# EAGLE board VoltSensor (EAGLE 8.2.2)
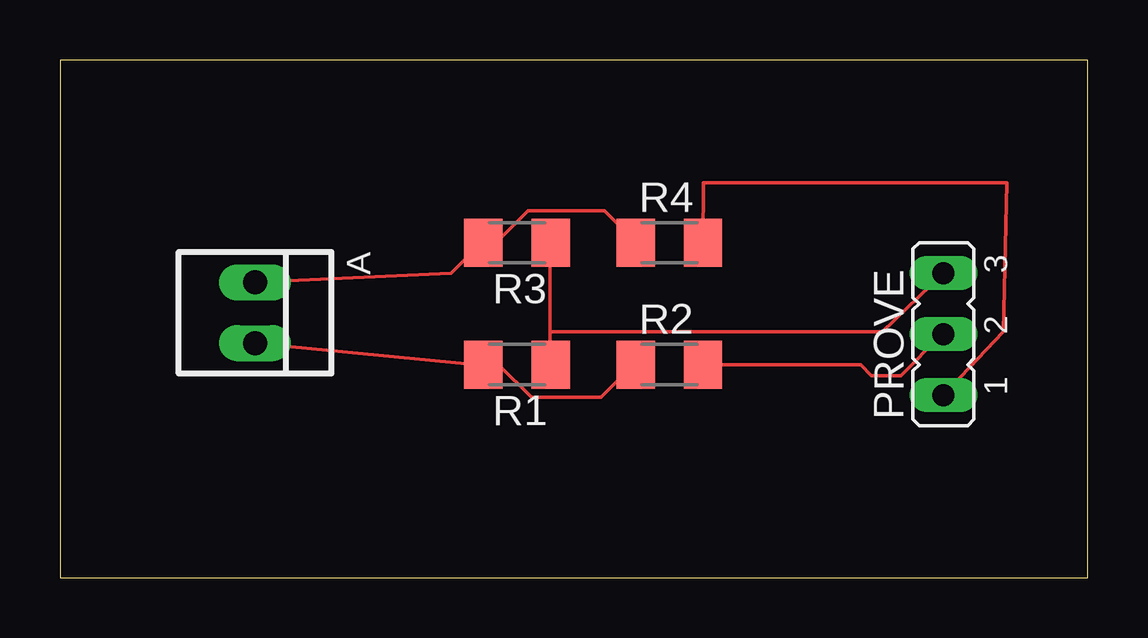
[diagram p0: board, top side]

Size 42.85 x 21.58 mm. Coordinates in mm from the lower left corner, seen from the top.
Outline: 0,0 42.85,0 42.85,21.58 0,21.58 0,0
Copper layers (1*16): Top 0.035mm / dielectric 1.5mm / Bottom 0.035mm
Design rules "default": minimum track width 6mil, minimum drill 0.35mm, track to track 6mil, track to pad 6mil, pad to pad 6mil, via to via 6mil, smd to smd 6mil, copper to edge 40mil, drill to drill 6mil, minimum pad ring 10mil, minimum via ring 8mil, stop-mask expansion 4mil, vias tented up to drill 0mil, thermal gap 10mil

## Footprints (pad centres in the part's own frame; a part is rotated, then mirrored left to right if it is on the bottom)
22-23-2021 = drill 1 long: 1 -1.27,0; 2 1.27,0
JP2 = drill 0.914 long: 1 -2.54,0; 2 0,0; 3 2.54,0
M1206 = smd 1.6 x 2: 1 -1.4,0; 2 1.4,0

## Placement (x,y rotation side)
A  to ADS1015 A0,A1  [22-23-2021]  8.13,11.05 270 top
PROVE  [JP2]  36.83,10.16 90 top
R1  100kΩ  [M1206]  19.05,8.89 180 top
R2  510kΩ  [M1206]  25.4,8.89 0 top
R3  100kΩ  [M1206]  19.05,13.97 180 top
R4  510kΩ  [M1206]  25.4,13.97 0 top

## Library data of the parts
A = con-molex; MF: MOLEX; MPN: 22-23-2021; OC_FARNELL: 1462926; OC_NEWARK: 25C3832
PROVE = jumper
R1-R4 = resistor

## Nets
N$1: A.1 R3.2 R4.1
N$2: A.2 R1.2 R2.1
N$3: PROVE.1 R4.2
N$4: PROVE.2 R2.2
PE: PROVE.3 R1.1 R3.1

## Tracks (layer width: path | path; a pad name or v marks a point on that pad's centre or on a via)
N$1
  Top 0.152: R4.1 23.93,14.07 22.71,15.29 19.51,15.29 18.29,14.07 17.68,14.07 R3.2 17.53,13.92 16.31,12.7 A.1
N$2
  Top 0.152: R2.1 23.93,8.89 22.55,7.52 19.66,7.52 18.29,8.89 R1.2 17.53,8.89 17.58,8.84 17.78,8.84 A.2
N$3
  Top 0.152: R4.2 26.82,16.46 39.47,16.46 39.32,10.26 PROVE.1
N$4
  Top 0.152: R2.2 33.38,8.89 33.83,8.43 35.05,8.43 36.73,10.11 PROVE.2
PE
  Top 0.152: 20.42,10.26 20.42,13.92 R3.1 | 20.42,10.26 20.42,8.89 R1.1 | 20.42,10.26 34.29,10.26 PROVE.3